# Altium PCB KS2E_FC.PcbDoc
Units mm, origin at the board's own origin, x right, y up, seen from the top; angles counter-clockwise.
Board outline 75.56 x 52.07 mm, 4 copper layers (Top Copper, Signal Layer 1, Signal Layer 2, Bottom Copper), stack 1.57 mm thick; 15 components, 20 nets, 93 pads, 3 vias.
Unrouted connection lines stored in the file: 13.
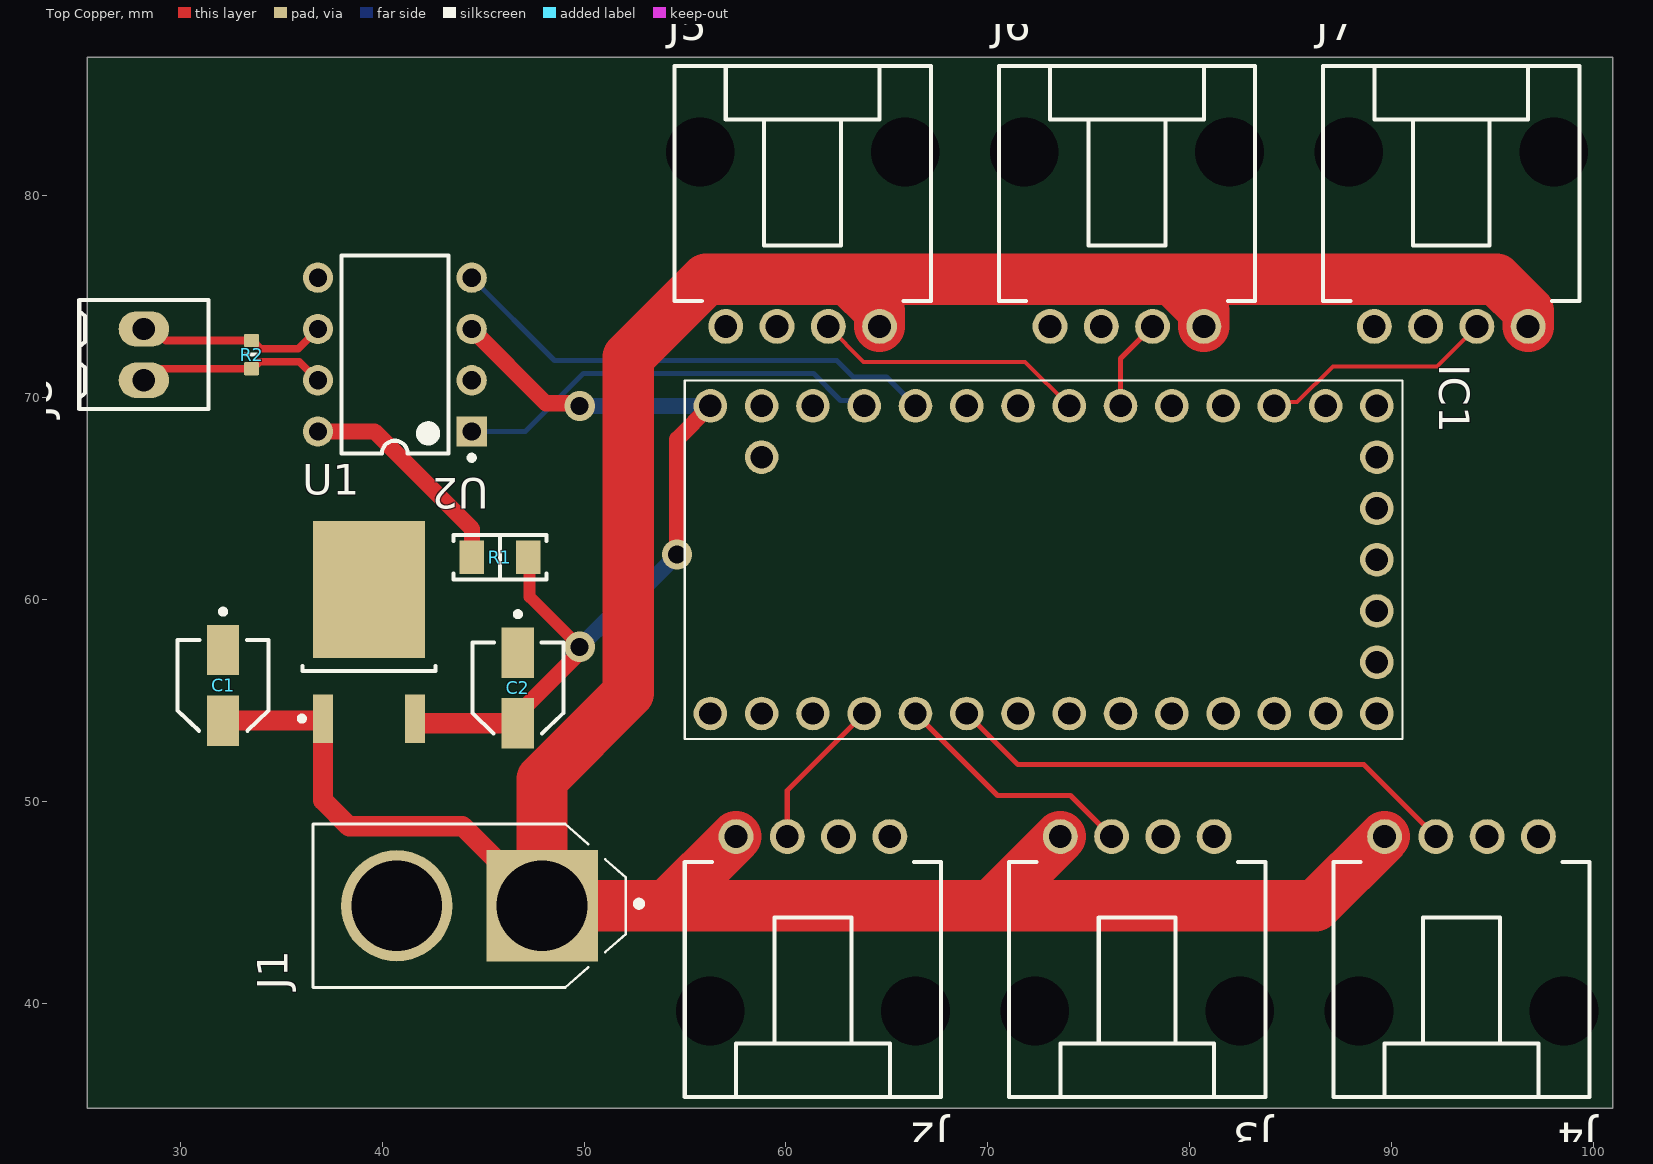
[diagram p0: Top Copper view]
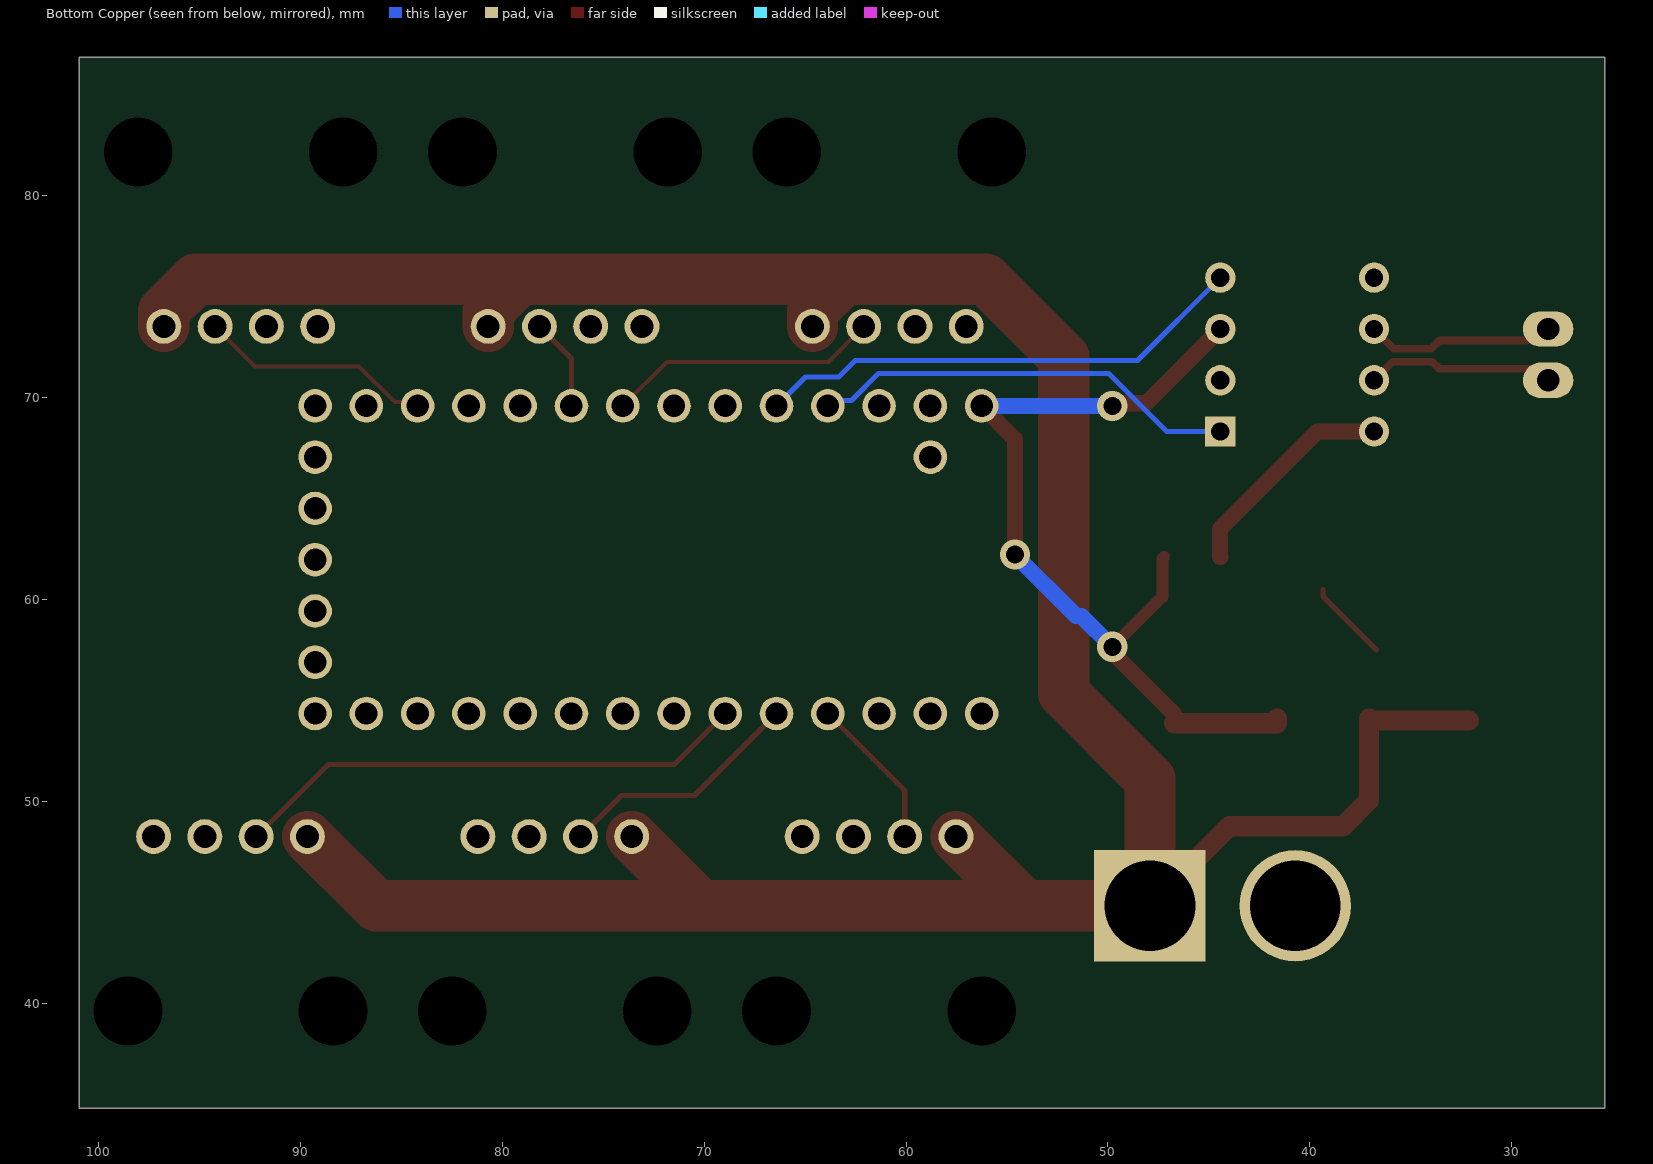
[diagram p1: Bottom Copper view, seen from below]
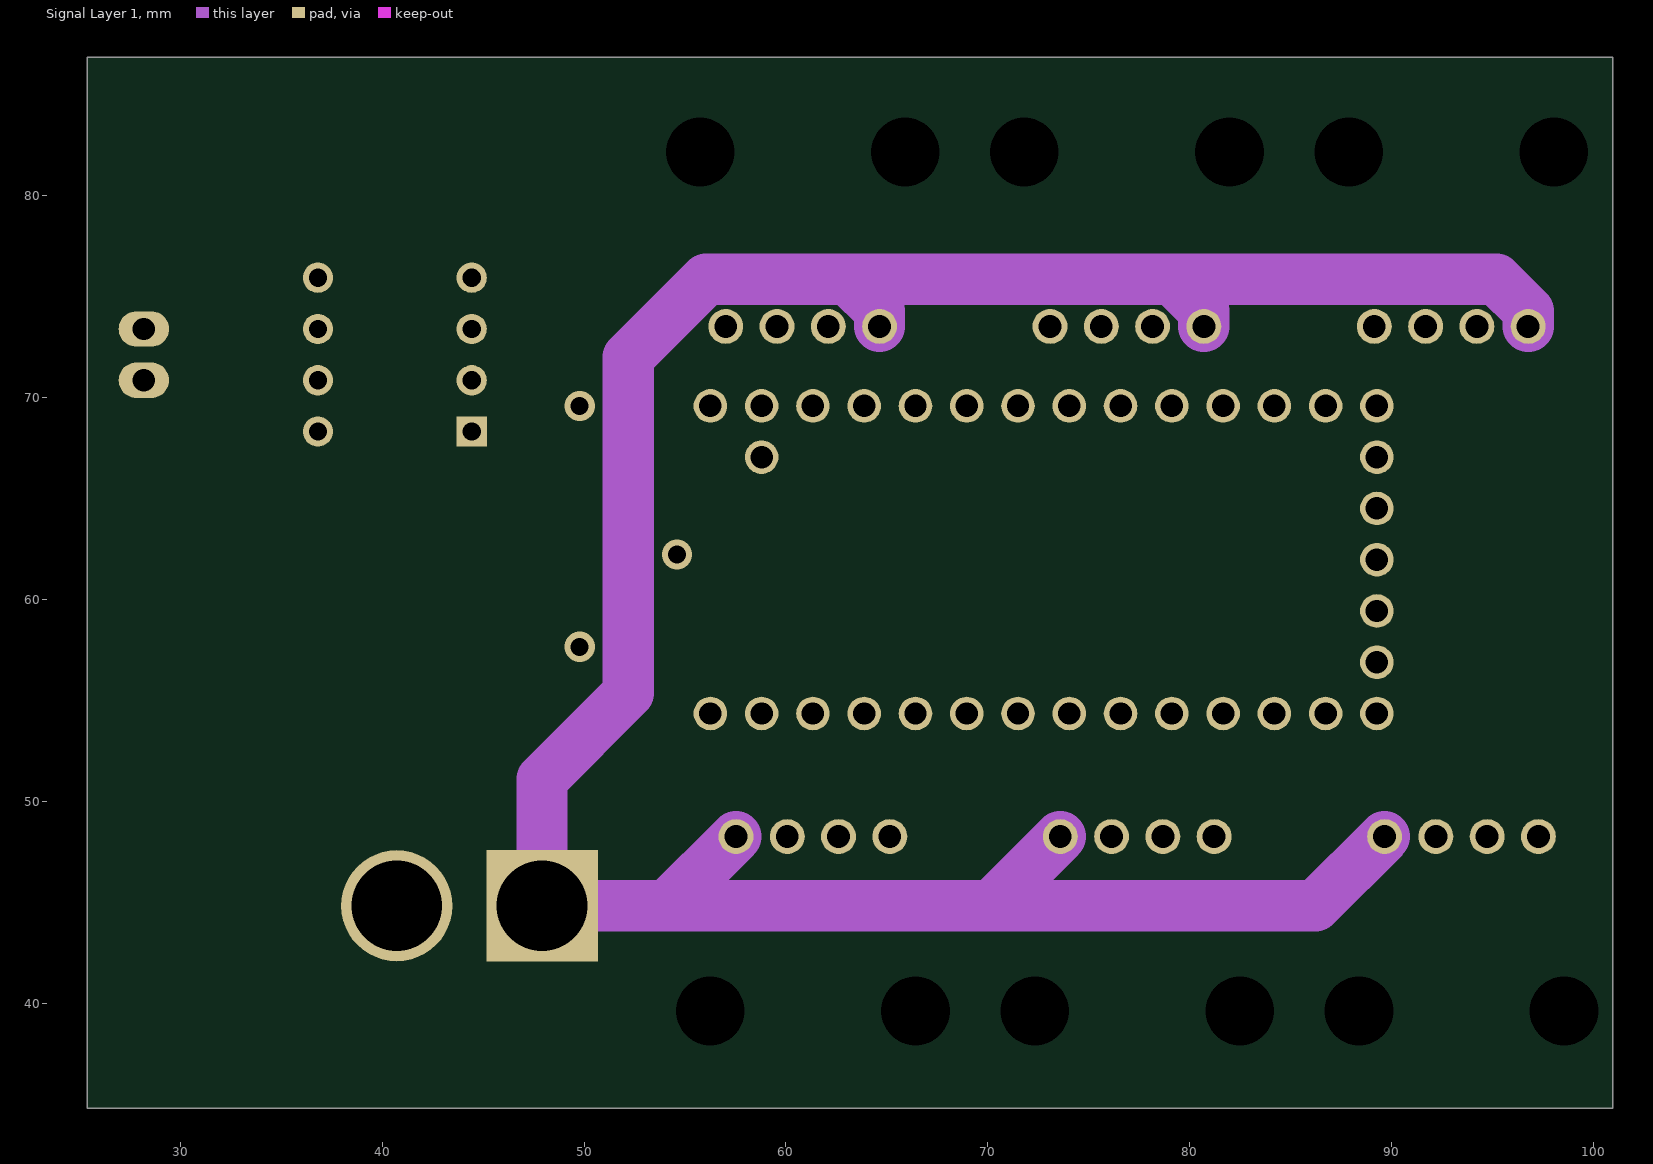
[diagram p2: Signal Layer 1]
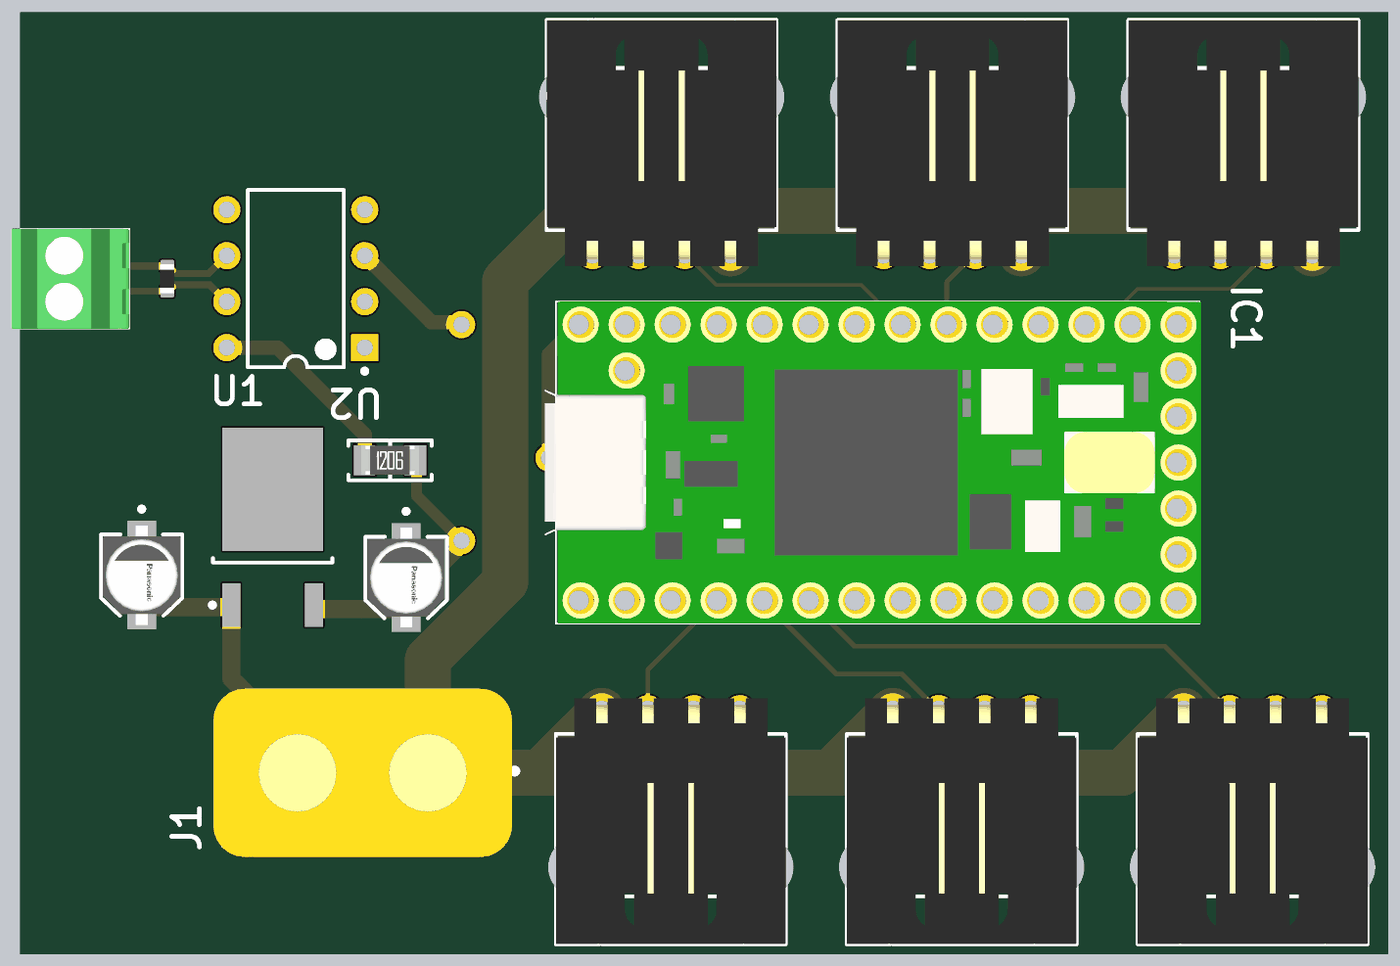
[diagram p3: 3D render of the assembled board from above, using the file's embedded part models]

## Layer stack, top to bottom
Top Mask: solder mask 0.015, Solder Resist, Dk 3.8
Top Copper: signal copper 0.035
Dielectric 1: prepreg 0.1, 2313, Dk 4.05
Signal Layer 1: signal copper 0.0175
Core: core 1.265, FR-4, Dk 4.5
Signal Layer 2: signal copper 0.0175
Dielectric 2: prepreg 0.1, 2313, Dk 4.05
Bottom Copper: signal copper 0.035
Bottom Mask: solder mask 0.015, Solder Resist, Dk 3.8

## Board outline
25.4,34.798 63.215,34.798 100.965,34.798 100.965,86.868 25.4,86.868

## Design rules (kind name [scope] priority, off if disabled: settings)
BoardOutlineClearance [All] p1: gap=0.2 ignorepadtopadclearanceinfootprint=FALSE except(0.4: Arc-SplitBarrior Arc-SplitContinuation Track-SplitBarrior Track-SplitContinuation SMDPad-SplitBarrior SMDPad-SplitContinuation THPad-SplitBarrior THPad-SplitContinuation Via-SplitBarrior Via-SplitContinuation Fill-SplitBarrior Fill-SplitContinuation Poly-SplitBarrior Poly-SplitContinuation Region-SplitBarrior Region-SplitContinuation Text-SplitBarrior Text-SplitContinuation)
Clearance "Clearance Bottom Layer" [OnLayer('Bottom Layer')] p1: gap=0.203 ignorepadtopadclearanceinfootprint=TRUE except(0.254: Arc-Text Track-Text SMDPad-Text THPad-Text Via-Text Fill-Text Poly-Text Region-Text Text-Text)
Clearance "Clearance Top Layer" [OnLayer('Top Layer')] p2: gap=0.203 ignorepadtopadclearanceinfootprint=TRUE except(0.254: Arc-Text Track-Text SMDPad-Text THPad-Text Via-Text Fill-Text Poly-Text Region-Text Text-Text)
Clearance [All] p3: gap=0.2 ignorepadtopadclearanceinfootprint=FALSE except(0.089: Arc-Arc Arc-Track Arc-SMDPad Track-Track Track-SMDPad SMDPad-SMDPad; 0.127: Arc-Via Track-Via SMDPad-Via THPad-Via Via-Via; 0.254: Arc-Text Track-Text SMDPad-Text THPad-Text Via-Text Fill-Text Poly-Text Region-Text Text-Text)
DiffPairsRouting [All] p1: maxlimit=0.254 minlimit=0.254 mostfreqgap=0.254 toplayer_minwidth=0.381 toplayer_maxwidth=0.381 toplayer_prefwidth=0.381 midlayer1_minwidth=0.381 midlayer1_maxwidth=0.381 midlayer1_prefwidth=0.381 midlayer2_minwidth=0.381 midlayer2_maxwidth=0.381 midlayer2_prefwidth=0.381 bottomlayer_minwidth=0.381 bottomlayer_maxwidth=0.381 bottomlayer_prefwidth=0.381 maxuncoupledlength=12.7
HoleSize [All] p1: absolutevalues=TRUE maxlimit=6.3 minlimit=0.2 maxpercent=80.000 minpercent=20.000
MinimumAnnularRing [All] p1: minimumring=0.076
MinimumSolderMaskSliver [All] p1: minsoldermaskwidth=0.1
PolygonConnect PolygonConnect_1 [All] p1: thpad.connectstyle=Relief thpad.reliefconductorwidth=0.508 thpad.reliefentries=4 thpad.polygonreliefangle="90 Angle" thpad.airgapwidth=0.254 smdpad.connectstyle=Relief smdpad.reliefconductorwidth=0.508 smdpad.reliefentries=4 smdpad.polygonreliefangle="90 Angle" smdpad.airgapwidth=0.254 via.connectstyle=Direct via.reliefconductorwidth=0.508 via.reliefentries=4 via.polygonreliefangle="90 Angle" via.airgapwidth=0.254
RoutingCorners [All] p1: cornerstyle=Round minsetback=2.54 maxsetback=2.54
RoutingVias [All] p1: holewidth=0.5 width=1 viastyle="Through Hole" minholewidth=0.2 minwidth=0.45 maxholewidth=1 maxwidth=2
SilkToSilkClearance [All] p1: silktosilkclearance=0.1
SilkToSolderMaskClearance [IsPad] p1: minsilkscreentomaskgap=0.1 clearancetoexposedcopper=TRUE
SolderMaskExpansion [All] p1: expansion=0.102 istentingtop=FALSE
Width [All] p1: maxlimit=2.54 minlimit=0.089 preferedwidth=0.381
24 further rules are at their usual default settings.

## Classes and differential pairs
differential pair CAN: +CAN_P -CAN_N

## Components (designator, comment, footprint, x,y, rotation, side; value= is the part's Value field where it differs from the comment)
C1 "EEEFK1E100R" FP-FKB-MFG 32.118,55.753 r270 top
C2 "EEEFK1E100R" FP-FKB-MFG 46.723,55.626 r270 top
IC1 "TEENSY_4.0" TEENSY40 56.261,54.356 r0 top
J1 "XT60-M-3D" AMASS_XT60-M 44.323,44.831 r180 top
J2 "0705530003" "MOLEX SDA-70553-4PIN" 61.341,42.037 r180 top
J3 "0705530003" "MOLEX SDA-70553-4PIN" 77.406,42.037 r180 top
J4 "0705530003" "MOLEX SDA-70553-4PIN" 93.472,42.037 r180 top
J5 "0705530003" "MOLEX SDA-70553-4PIN" 60.833,79.756 r0 top
J6 "0705530003" "MOLEX SDA-70553-4PIN" 76.898,79.756 r0 top
J7 "0705530003" "MOLEX SDA-70553-4PIN" 92.964,79.756 r0 top
J8 "282834-2" "TE 282834-2" 28.194,72.136 r90 top
R1 "10 kOhms" "RES 1206_3216" 45.834,62.103 r0 top
R2 "Jumper 0603" RESC0603(1608)_L 33.528,72.136 r270 top value=0
U1 "LF50ABDT-TR" TO-252_M 39.351,58.402 r90 top
U2 "MCP2551-I/P" PDIP300-P8 40.627,72.136 r180 top

## Footprints (in the part's own frame and the unit in brackets; to place one, negate y for a bottom-side part, rotate by r counter-clockwise, add the part's x,y. Pads: shape width x height; smd on the part's side, far side on the other; paste and mask are expansions set on the pad)
AMASS_XT60-M [mm]
  rect 5.516x5.516 hole 4.5: 1(-3.6,0)
  round 5.516 hole 4.5: 2(3.6,0)
  silkscreen extent -8.55,-4.05 7.75,4.05, body extent -8.25,-4.65 8.25,4.65, height 17
FP-FKB-MFG [mm]
  rect 2.5x1.6 smd paste+0 mask+0: 1(-1.75,0) 2(1.75,0)
  silkscreen extent -3.77,-2.25 2.25,2.25, body extent -3.25,-2.5 3.25,2.5, height 0.25
"MOLEX SDA-70553-4PIN" [mm] "SL Right Angle Header W/LAtch & Trip-Pegs 2.54mm Centres"
  round 1.73 hole 1.13: 1(-3.81,-6.223) 2(-1.27,-6.223) 3(1.27,-6.223) 4(3.81,-6.223)
  round 1.524 hole 3.4 unplated: 5(-5.08,2.417) 5(5.08,2.417)
  silkscreen extent -6.35,-4.95 6.35,6.68, body extent -6.35,-6.92 6.35,6.67, height 6.98
PDIP300-P8 [mm] "8-Pin Plastic Dual In-Line Package (PDIP)"
  rect 1.5x1.5 hole 0.9: 1(-3.81,3.81)
  round 1.5 hole 0.9: 2(-3.81,1.27) 3(-3.81,-1.27) 4(-3.81,-3.81) 5(3.81,-3.81) 6(3.81,-1.27) 7(3.81,1.27) 8(3.81,3.81)
  silkscreen extent -3.94,-4.9 2.65,5.23, body extent -3.55,-4.9 3.55,4.9, height 4.32
"RES 1206_3216" [mm] "Chip Resistor, 2-Leads, Body 3.13x1.55mm, IPC Medium Density"
  rect 1.2x1.65 smd: 1(-1.4,0) 2(1.4,0)
  silkscreen extent -2.3,-1.1 2.3,1.1, body extent -1.6,-0.8 1.6,0.8, height 0.6
RESC0603(1608)_L [mm] "Chip Resistor, Body 1.6x0.8mm, IPC High Density"
  rrect25% 0.66x0.76 smd: 1(-0.7,0) 2(0.7,0)
  silkscreen extent 0,-0.3 0,0.3, body extent -0.8,-0.4 0.8,0.4, height 0.45
"TE 282834-2" [mm]
  oval 1.75x2.5 hole 1.1: 1(-1.27,0) 2(1.27,0)
  silkscreen extent -2.7,-3.2 2.7,3.2, body extent -2.77,-3.25 2.77,3.25, height 10
TEENSY40 [mm]
  round 1.665 hole 1.11: 1(0,0) 2(2.54,0) 3(5.08,0) 4(7.62,0) 5(10.16,0) 6(12.7,0) 7(15.24,0) 8(17.78,0) 9(20.32,0) 10(22.86,0) 11(25.4,0) 12(27.94,0) 13(30.48,0) 14(33.02,0) 15(33.02,2.54) 16(33.02,5.08) 17(33.02,7.62) 18(33.02,10.16) 19(33.02,12.7) 20(33.02,15.24) 21(30.48,15.24) 22(27.94,15.24) 23(25.4,15.24) 24(22.86,15.24) 25(20.32,15.24) 26(17.78,15.24) 27(15.24,15.24) 28(12.7,15.24) 29(10.16,15.24) 30(7.62,15.24) 31(5.08,15.24) 32(2.54,15.24) 33(0,15.24) 34(2.54,12.7)
  silkscreen extent -1.27,-1.27 34.29,16.51, body extent -1.87,-1.27 34.39,16.51, height 4.55
TO-252_M [mm] "D-PAK, 4-Leads, Body 6.1x6.5mm, Pitch 2.28mm, Lead Span 9.7mm, IPC Low Density"
  rect 2.4x1 smd: 1(-4.3,2.28) 3(-4.3,-2.28)
  rect 6.8x5.55 smd: 4(2.1,0)
  silkscreen extent -4.42,-3.3 -1.7,3.45, body extent -1.95,-3.3 4.25,3.3, height 2.4

## Part data
C1 C2: library part CMP-05427-000055-1, "CAP ALUM 10UF 20% 25V SMD", Capacitance=10uF, Case/Package=Radial, Dielectric Material=Aluminium, ESR (Equivalent Series Resistance)=1.35R, Leakage Current=3uA, Max Operating Temperature=105°C, Min Operating Temperature=-55°C, Package Quantity=1, Ripple Current=90mA, Tolerance=20%, Voltage=25V, Construction=Cylindrical, Contact Plating=Tin, Diameter=4mm, Height=5.8mm, Height - Seated (Max)=0.24inch, Impedance=1.35R, Lead Free="Lead Free", Length=5.8mm, Life (Hours)=2000Hour, Mount="Surface Mount", Number of Pins=2, Packaging="Tape and Reel", Polarity=Polar, Radiation Hardening=No, REACH SVHC="No SVHC", Ripple Current (AC)=90mA, RoHS Compliant=Yes, Series=FK, Termination=SMD/SMT, Voltage Rating=25V, Voltage Rating (DC)=25V, Width=5.5mm
IC1: "Integrated Circuit", Manufacturer_Name=Teensy, Manufacturer_Part_Number="TEENSY 4.0", Datasheet Link=https://www.pjrc.com/store/teensy40.html, Height=4.64mm
J1: "Plug; DC supply; XT60; male; PIN: 2; for cable; soldered; 30A; 500V", Package="Package Analog Devices", Availability=Unavailable, MF=AMASS, MP=XT60-M, Price=None, SnapEDA_Link=https://www.snapeda.com/parts/XT60-M/AMASS/view-part/2883912/?ref=snap
J2 J3 J4 J5 J6 J7: "CONN HEADER R/A 4POS 2.54MM", Insulation Color=Black, Manufacturer=Molex, Material Flammability Rating="UL94 V-0", Operating Temperature="-40°C ~ 105°C", Supplier Part Number 1=WM4902-ND, Voltage Rating=250V, ComponentLink1Description=Datasheet, ComponentLink1URL=https://www.molex.com/pdm_docs/sd/705530002_sd.pdf, ComponentLink2Description="DigiKey Link", ComponentLink2URL=http://digikey.com/product-detail/en/molex/0705530003/WM4902-ND/114959, Connector Type=Header, Contact Finish - Mating=Gold, Contact Finish - Post=Tin, Contact Finish Thickness - Mating="15.0µin (0.38µm)", Contact Length - Mating="0.240\" (6.10mm)", Contact Length - Post="0.130\" (3.30mm)", Contact Material="Phosphor Bronze", Contact Shape=Square, Contact Type="Male Pin", Fastening Type="Latch Holder", Insulation Height="0.215\" (5.45mm)", Insulation Material="Polyester, Glass Filled", LastUpdated="1/12/2020 11:56:17 PM", Lifecycle Status=Active, Minimum Order=1, Mounting Type="Through Hole, Right Angle", Number of Positions=4, Number of Positions Loaded=All, Number of Rows=1, Packaging=Tube, Part Number=0705530003, Part Status=Active, PartId=87, Pitch - Mating="0.100\" (2.54mm)", Price=1.05, Series="SL 70553", Shrouding="Shrouded - 4 Wall", Style="Board to Cable/Wire", Supplier 1=DigiKey, Termination=Solder
J8: "TERM BLK 2P SIDE ENT 2.54MM PCB", Color=Green, Current=10A, Manufacturer="TE Connectivity AMP Connectors", Supplier Part Number 1=A98333-ND, Voltage=150V, ComponentLink1Description=Datasheet, ComponentLink1URL=https://www.te.com/commerce/DocumentDelivery/DDEController?Action=srchrtrv&DocNm=282834&DocType=Customer+Drawing&DocLang=English, ComponentLink2Description="DigiKey Link", ComponentLink2URL=http://digikey.com/product-detail/en/te-connectivity-amp-connectors/282834-2/A98333-ND/1150135, LastUpdated="1/15/2020 4:15:38 AM", Lifecycle Status=Active, Mating Orientation="Horizontal with Board", Minimum Order=1, Mounting Type="Through Hole", Number of Levels=1, Packaging=Bulk, Part Number=282834-2, Part Status=Active, Pitch="0.100\" (2.54mm)", Positions Per Level=2, Price=0.88, Series=Buchanan, Supplier 1=DigiKey, Wire Gauge="16-30 AWG", Wire Termination="Screw - Rising Cage Clamp"
R1: library part CRG1206F10K, "RES SMD 10K OHM 1% 1/4W 1206", Device Package="1206 (3216 Metric)", Manufacturer="TE Connectivity Passive Product", Operating Temperature="-55°C ~ 155°C", Power (Watts)="0.25W, 1/4W", Supplier Device Package=1206, Supplier Part Number 1=A106069CT-ND, Temperature Coefficient=±100ppm/°C, Tolerance=±1%, ComponentLink1Description=Datasheet, ComponentLink1URL=https://www.te.com/commerce/DocumentDelivery/DDEController?Action=srchrtrv&DocNm=1773204&DocType=DS&DocLang=English, ComponentLink2Description="DigiKey Link", ComponentLink2URL=http://digikey.com/product-detail/en/te-connectivity-passive-product/CRG1206F10K/A106069CT-ND/3477720, Composition="Thick Film", Height - Seated (Max)="0.026\" (0.65mm)", LastUpdated="9/2/2020 1:13:10 AM", Lifecycle Status=Active, Minimum Order=1, Number of Terminations=2, Package / Case="1206 (3216 Metric)", Packaging=TapeAndReel, Part Number=CRG1206F10K, Part Status=Active, PartId=26989, Price=0.01, Resistance="10 kOhms", Series="CRG, Neohm", Size / Dimension="0.122\" L x 0.061\" W (3.10mm x 1.55mm)", Supplier 1=DigiKey
R2: library part CMP-009-00175-3, Case/Package=0603, Max Operating Temperature=155°C, Min Operating Temperature=-55°C, Pins=2
U1: library part CMP-0244-00070-1, "500mA, Very Low Drop (0.45V) Voltage Regulator, 5V, 3-Pin DPAK, Tape and Reel", ComponentLink1Description="Manufacturer URL", ComponentLink1URL=http://www.st.com, ComponentLink2Description=Datasheet, ComponentLink2URL=http://www.st.com/internet/com/TECHNICAL_RESOURCES/TECHNICAL_LITERATURE/DATASHEET/CD00000546.pdf, DatasheetVersion=1/11/2010, PackageDescription="3-Pin Transistor Outline Package 2.28 mm Pitch, 9.7 mm Lead Span (DPAK)", PackageReference=TO-252, PackageVersion=2011
U2: library part CMP-0186-00101-2, "High-Speed CAN Transceiver, 8-Pin PDIP, Industrial Temperature", Code_JEDEC=MS-001, ComponentLink1Description="Manufacturer URL", ComponentLink1URL=http://www.microchip.com/, ComponentLink2Description=Datasheet, ComponentLink2URL=http://ww1.microchip.com/downloads/en/DeviceDoc/21667F.pdf, ComponentLink3Description="Package Specification", ComponentLink3URL=http://www.microchip.com/stellent/groups/techpub_sg/documents/packagingspec/en012702.pdf, DatasheetVersion="revF, Jul-2010", PackageDescription="8-Lead Plastic Dual In-Line (P) - 300 mil Body [PDIP]", PackageReference=PDIP300-P8, PackageVersion="revBB, Aug-2009", RevisionNote="URLs added. DatasheetVersion updated."

## Via types
v1: diameter 1.5, hole 0.9, Top Copper to Bottom Copper, 3 vias

## Nets (pads, with @x,y where several pads share a name; then routed paths per layer and width w, separated by ;. In a path a pad name is that pad's centre, name@x,y a point inside that pad or via, vN(x,y) a via of type N, cw(c..) or ccw(c..) an arc to the next point about the centre after c; other vN are vias at no path point)
+5V: C2.2 IC1.33 R1.2 U1.3 U2.3 | length 44
  Top Copper w0.6: R1.2 47.308,62.029 47.308,60.134 v1(49.784,57.658)
  Top Copper w0.8: U2.3 48.113,69.73 49.65,69.73 v1(49.784,69.596) ; C2.2 46.723,54.326 49.65,57.253 49.65,57.524 v1(49.784,57.658) ; v1(54.61,62.23) 54.61,67.945 IC1.33
  Top Copper w1: U1.3 41.631,53.876 C2.2
  Bottom Copper w0.8: v1(49.784,57.658) 51.315,59.189 51.577,59.189 54.61,62.222 v1(54.61,62.23) ; v1(49.784,69.596) IC1.33
+12V: C1.2 J1.1 J2.4 J3.4 J4.4 J5.4 J6.4 J7.4 U1.1 | length 292.8
  Top Copper w1: C1.2 U1.1@37.071,54.003 ; U1.1 U1.1@37.071,54.003 ; J1.1 43.986,48.768 38.354,48.768 37.071,50.051 U1.1@37.071,54.003
  Top Copper w2.54: J2.4 54.102,44.831 ; J5.4 64.643,74.295 63.07,75.868 ; J3.4 70.168,44.831 ; J6.4 80.709,74.295 79.136,75.868 ; J4.4 86.233,44.831 70.168,44.831 ; J7.4 96.774,74.295 95.201,75.868 79.136,75.868 ; 54.102,44.831 70.168,44.831 ; 54.102,44.831 J1.1 47.923,51.104 52.193,55.375 52.193,72.006 56.056,75.868 63.07,75.868 ; 63.07,75.868 79.136,75.868
  Signal Layer 1 w2.54: J2.4 54.102,44.831 ; J5.4 64.643,74.295 63.07,75.868 ; J3.4 70.168,44.831 ; J6.4 80.709,74.295 79.136,75.868 ; J4.4 86.233,44.831 70.168,44.831 ; J7.4 96.774,74.295 95.201,75.868 79.136,75.868 ; 54.102,44.831 J1.1 47.923,51.104 52.193,55.375 52.193,72.006 56.056,75.868 63.07,75.868 ; 54.102,44.831 70.168,44.831 ; 63.07,75.868 79.136,75.868
CAN_N: J8.2 R2.1 U2.6 | length 9.6
  Top Copper w0.381: J8.2@28.194,73.914 29.272,72.836 33.578,72.836 33.99,72.424 35.835,72.424 U2.6
CAN_P: J8.1 R2.2 U2.7 | length 9.2
  Top Copper w0.381: J8.1@28.194,71.374 28.256,71.436 33.578,71.436 33.931,71.789 35.894,71.789 U2.7
CAN_RX: IC1.30 U2.1 | length 21.3
  Bottom Copper w0.254: U2.1 47.094,68.326 49.978,71.21 61.367,71.21 62.711,69.866 63.611,69.866 IC1.30
CAN_TX: IC1.29 U2.4 | length 24.6
  Bottom Copper w0.254: U2.4 48.543,71.84 62.526,71.84 63.334,71.032 64.985,71.032 IC1.29
GND: C1.1 C2.1 IC1.1 IC1.17 IC1.32 IC1.34 J1.2 J2.1 J3.1 J4.1 J5.1 J6.1 J7.1 U1.4 U2.2 | length 4.1
  Top Copper w0.254: U1.4@36.703,57.503 39.351,60.151 U1.4
NetR1_1: R1.1 U2.8 | length 11
  Top Copper w0.8: U2.8 39.624,68.326 44.45,63.5 44.45,62.119 R1.1
PWM_1: IC1.4 J2.3 | length 7.7
  Top Copper w0.254: J2.3 60.071,50.546 IC1.4
PWM_2: IC1.5 J3.3 | length 12.2
  Top Copper w0.254: IC1.5 70.485,50.292 74.105,50.292 J3.3
PWM_3: IC1.6 J4.3 | length 25.8
  Top Copper w0.254: IC1.6 71.495,51.822 88.64,51.822 J4.3
PWM_4: IC1.26 J5.3 | length 13.6
  Top Copper w0.2: J5.3 63.857,71.779 71.858,71.779 IC1.26
PWM_5: IC1.25 J6.3 | length 4.6
  Top Copper w0.254: IC1.25 76.581,71.945 J6.3
PWM_6: IC1.22 J7.3 | length 11.7
  Top Copper w0.2: IC1.22 84.395,69.79 85.333,69.79 87.102,71.558 92.259,71.558 J7.3
TACH_1: J2.2
TACH_2: J3.2
TACH_3: J4.2
TACH_4: J5.2
TACH_5: J6.2
TACH_6: J7.2
pads on no net: IC1.2 IC1.3 IC1.7 IC1.8 IC1.9 IC1.10 IC1.11 IC1.12 IC1.13 IC1.14 IC1.15 IC1.16 IC1.18 IC1.19 IC1.20 IC1.21 IC1.23 IC1.24 IC1.27 IC1.28 IC1.31 J2.5 J3.5 J4.5 J5.5 J6.5 J7.5 U2.5